# Altium PCB DCDC_5V.PcbDoc
Units mm, origin at the board's own origin, x right, y up, seen from the top; angles counter-clockwise.
Board outline 21 x 14 mm, 4 copper layers (Top Layer, Int1 (GND), Int2 (PWR), Bottom Layer), stack 1.369 mm thick; 8 components, 6 nets, 43 pads, 0 vias.
Unrouted connection lines stored in the file: 31.
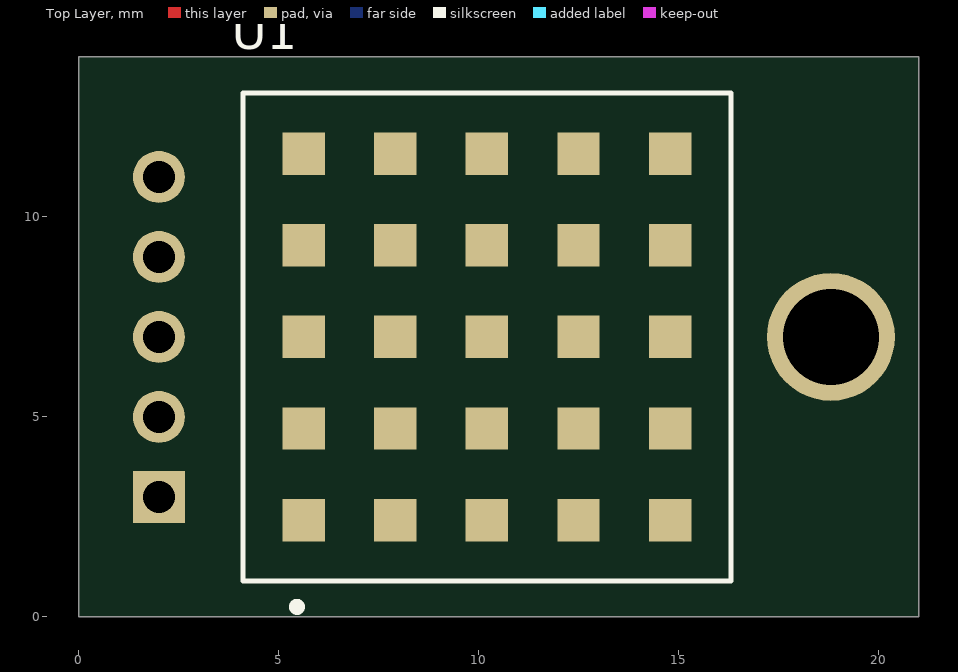
[diagram p0: Top Layer view]
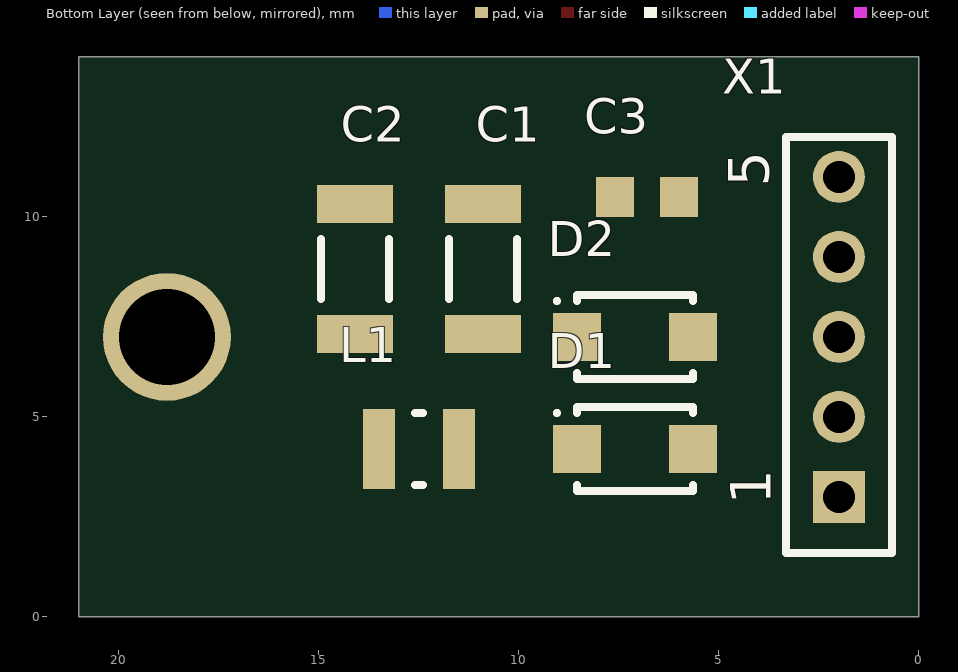
[diagram p1: Bottom Layer view, seen from below]
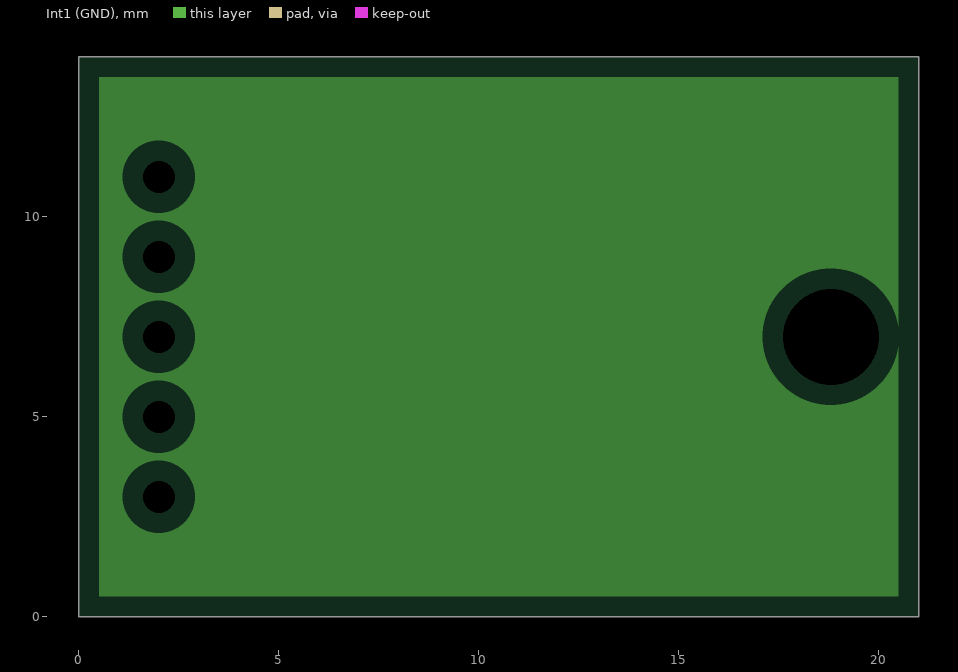
[diagram p2: Int1 (GND), clearances drawn from the general rule]
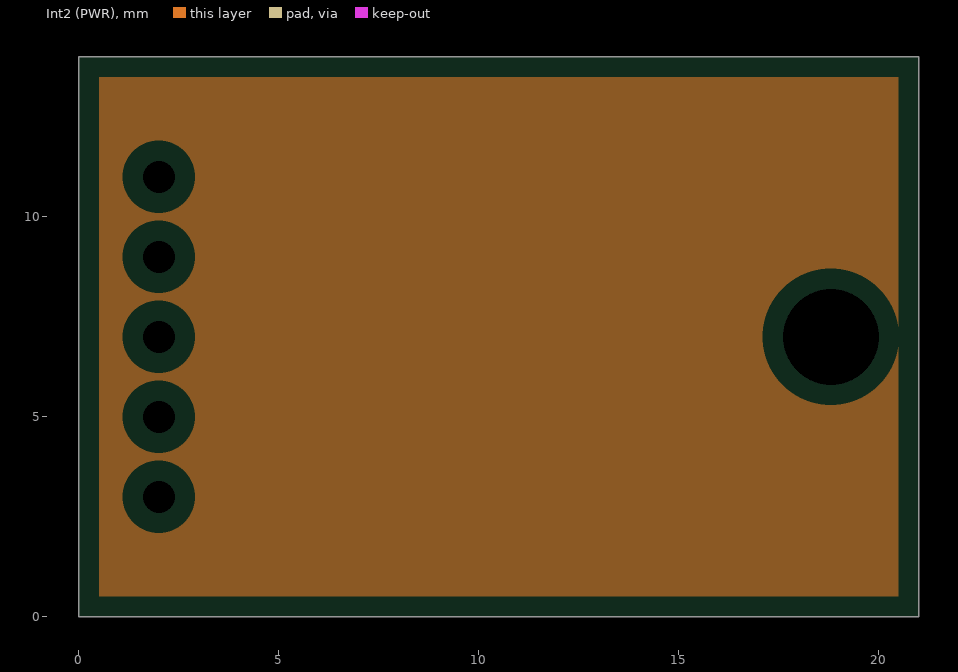
[diagram p3: Int2 (PWR), clearances drawn from the general rule]

## Layer stack, top to bottom
Top Solder: solder mask 0.0254, SM-001, Dk 4
Top Layer: signal copper 0.035
Dielectric 1: prepreg 0.1295, PP-017, Dk 4.3
Dielectric 2: prepreg 0.1295, PP-017, Dk 4.3
Int1 (GND): plane copper 0.035
Dielectric 3: core 0.7112, Core-039, Dk 4.8
Int2 (PWR): plane copper 0.035
Dielectric 4: prepreg 0.1295, PP-017, Dk 4.3
Dielectric 5: prepreg 0.1295, PP-017, Dk 4.3
Bottom Layer: signal copper 0.035
Bottom Solder: solder mask 0.0254, SM-001, Dk 4

## Board outline
0,0 21,0 21,14 0,14

## Design rules (kind name [scope] priority, off if disabled: settings)
Clearance [All] p1: gap=0.2 ignorepadtopadclearanceinfootprint=FALSE except(0: Arc-Hole Track-Hole SMDPad-Hole THPad-Hole Via-Hole Fill-Hole Poly-Hole Region-Hole Text-Hole)
HoleSize [All] p1: absolutevalues=TRUE maxlimit=3.5 minlimit=0.025 maxpercent=80.000 minpercent=20.000
PlaneClearance [All] p1: clearance=0.508
PlaneConnect [All] p1: planeconnectstyle=Relief reliefexpansion=0.508 reliefentries=4 reliefconductorwidth=0.254 reliefairgap=0.254
PolygonConnect [All] p1: connectstyle=Relief reliefconductorwidth=0.254 reliefentries=4 polygonreliefangle="90 Angle" airgapwidth=0.254
RoomDefinition DCDC_5V [InComponentClass('DCDC_5V')] p1: confinementstyle=ConfineIn formatcopy=TRUE lockcomponents=FALSE outline 151.498,1.499 200.498,1.499 200.498,16.999 151.498,16.999
RoutingCorners [All] p1: cornerstyle=45-Degree minsetback=2.5 maxsetback=2.5
RoutingVias [All] p1: holewidth=0.25 width=0.65 viastyle="Through Hole" minholewidth=0.25 minwidth=0.6 maxholewidth=1.8 maxwidth=2
SolderMaskExpansion [All] p1: expansion=0.102 istentingtop=FALSE
Width [All] p1: maxlimit=0.5 minlimit=0.15 preferedwidth=0.2
26 further rules are at their usual default settings.

## Components (designator, comment, footprint, x,y, rotation, side; value= is the part's Value field where it differs from the comment)
C1 "CAP CER 3.3uF 1206" CAPC3216X19N 10.9,8.7 r270 bottom value=3.3uF
C2 "CAP CER 2.2uF 1206" CAPC3216X19N 14.1,8.7 r270 bottom value=2.2uF
C3 "CAP CER 22uF 0603" CAPC1608X08N 6.8,10.5 r0 bottom value=22uF
D1 "DIODE SCHOTTKY 100V 1A SOD123" DIOM2617X11N 7.1,4.2 r180 bottom value=PMEG10010ELRX
D2 "DIODE SCHOTTKY 100V 1A SOD123" DIOM2617X11N 7.1,7 r180 bottom value=PMEG10010ELRX
L1 "IND SMD 2020" INDC2520X12N 12.5,4.2 r0 bottom value=4.7uH
U1 "DCDC 5V 1.5A" CONV_RPMH5.0-1.5 10.2,7 r90 top value=RPMH5.0-1.5
X1 "CONNECT HEADER 5pos 180°" "62000611821 - 5pin" 2,8 r90 bottom

## Footprints (in the part's own frame and the unit in brackets; to place one, negate y for a bottom-side part, rotate by r counter-clockwise, add the part's x,y. Pads: shape width x height; smd on the part's side, far side on the other; paste and mask are expansions set on the pad)
"62000611821 - 5pin" [mm] "Socket Header, Pitch 2.00 mm, THT, Vertical, single row, 6p"
  rect 1.3x1.3 hole 0.8: 1(-5,0)
  round 1.3 hole 0.8: 2(-3,0) 3(-1,0) 4(1,0) 5(3,0)
  silkscreen extent -6.4,-1.33 4,1.33, body extent -6.25,-1.25 4,1.25, height 4.35
CAPC1608X08N [mm] "Chip Capacitor, 2-Leads, Body 1.60x0.80mm, IPC Medium Density"
  rect 0.95x1 smd: 1(-0.8,0) 2(0.8,0)
  body extent -0.87,-0.47 0.88,0.48, height 0.8
CAPC3216X19N [mm] "Chip Capacitor, 2-Leads, Body 3.20x1.65mm, IPC Medium Density"
  rect 0.95x1.9 smd: 1(-1.625,0) 2(1.625,0)
  silkscreen extent -0.75,-0.85 0.75,0.85, body extent -1.75,-0.95 1.75,0.95, height 1.9
CONV_RPMH5.0-1.5 [mm]
  rect 1.06x1.06 smd: A1(-4.58,4.58) A2(-2.29,4.58) A3(0,4.58) A4(2.29,4.58) A5(4.58,4.58) B1(-4.58,2.29) B2(-2.29,2.29) B3(0,2.29) B4(2.29,2.29) B5(4.58,2.29) C1(-4.58,0) C2(-2.29,0) C3(0,0) C4(2.29,0) C5(4.58,0) D1(-4.58,-2.29) D2(-2.29,-2.29) D3(0,-2.29) D4(2.29,-2.29) D5(4.58,-2.29) E1(-4.58,-4.58) E2(-2.29,-4.58) E3(0,-4.58) E4(2.29,-4.58) E5(4.58,-4.58)
  silkscreen extent -6.85,-6.1 6.1,6.1, body extent -6.34,-6.19 6.35,6.19, height 3.97
DIOM2617X11N [mm] "Molded Diode, 2-Leads, Body 2.60x1.70mm, IPC Medium Density"
  rect 1.2x1.2 smd: 1(-1.45,0) 2(1.45,0)
  silkscreen extent -2,-1.05 1.45,1.05, body extent -2,-0.95 2,0.95, height 1.1
INDC2520X12N [mm] "Chip Inductor, 2-Leads, Body 2.50x2.00mm, IPC Medium Density"
  rect 0.8x2 smd: 1(-1,0) 2(1,0)
  silkscreen extent -0.1,-0.9 0.1,0.9, body extent -1.35,-1.1 1.35,1.1, height 1.2

## Part data
C1: library part "CAP CER 3.3uF 10% 100V 1206", "3,3µF ±10% 100V Condensateurs céramique X7S 1206 (3216 métrique)", Supplier Part Number 1=445-15583-1-ND, Supplier 1=Digi-Key
C2: library part "CAP CER 2.2uF 10% 75V 1206", "2,2µF ±10% 75V Condensateurs céramique X7R 1206 (3216 métrique)", Supplier Part Number 1=445-181654-1-ND, Supplier 1=Digi-Key
C3: library part "CAP CER 22uF 200% 6V3 0603", "22µF ±20% 6,3V Condensateurs céramique X5R 0603 (1608 métrique)"
D1 D2: "Diode Schottky 100V 1A Montage en surface CFP3", Supplier Part Number 1=1727-2394-1-ND, Supplier 1=Digi-Key
L1: library part "IND SMD 4.7uH", "4,7µH Blindé Inducteur 1,5A 190mOhms maxi 1008 (2520 métrique)", Supplier Part Number 1=490-13051-1-ND, Supplier 1=Digi-Key
U1: library part RPMH5.0-1.5
X1: library part "CONNECT HEADER 5pos 180° 2mm", system=connector, Use=CommandBoard

## Free pads (board coordinates)
  round 3.2 hole 2.4: 1(18.8,7)

## Nets (pads, with @x,y where several pads share a name; then routed paths per layer and width w, separated by ;. In a path a pad name is that pad's centre, name@x,y a point inside that pad or via, vN(x,y) a via of type N, cw(c..) or ccw(c..) an arc to the next point about the centre after c; other vN are vias at no path point)
DCDC_5V: C3.2 U1.A5 U1.B5 U1.C5 X1.4
DCDC_GND: C1.1 C2.1 C3.1 U1.A3 U1.A4 U1.B1 U1.B2 U1.B3 U1.B4 U1.C2 U1.C3 U1.C4 U1.D2 U1.D3 U1.D4 U1.D5 U1.E3 U1.E4 X1.3 X1.5
NetC1_2: C1.2 D1.1 D2.1 L1.1
NetC2_2: C2.2 L1.2 U1.A1 U1.A2
NetD1_2: D1.2 X1.1
NetD2_2: D2.2 X1.2
pads on no net: U1.C1 U1.D1 U1.E1 U1.E2 U1.E5

## Polygon pours and split planes (outlines as drawn)
no net on Int1 (GND) (split plane): 20.49,0.51 0.51,0.51 0.51,13.49 20.49,13.49
no net on Int2 (PWR) (split plane): 20.49,0.51 0.51,0.51 0.51,13.49 20.49,13.49

## Silkscreen, mask and mechanical layers (free items; w line width, h text height)
Board:
  the board outline again, w1
Dimensions:
  the board outline again, w1
Fab Notes:
  drawing of 264 lines, arcs and shapes, not listed
  text "Layer" at 1.6,183.85 h1.5
  text "Name" at 7.876,183.85 h1.5
  text "Material" at 23.884,183.85 h1.5
  text "Thickness" at 33.916,183.85 h1.5
  text "Constant" at 42.873,183.85 h1.5
  text "Board Layer Stack" at 51.164,183.85 h1.5
  text "Top Overlay" at 7.876,180.85 h1.5
  text "Top Solder" at 7.876,177.85 h1.5
  text "SM-001" at 23.884,177.85 h1.5
  text "0.025mm" at 33.916,177.85 h1.5
  text "4" at 42.873,177.85 h1.5
  text "Top Surface Finish" at 7.876,174.85 h1.5
  text "Nickel, Gold" at 23.884,174.85 h1.5
  text "0.020mm" at 33.916,174.85 h1.5
  text "1" at 1.6,171.85 h1.5
  text "Top Layer" at 7.876,171.85 h1.5
  text "CF-004" at 23.884,171.85 h1.5
  text "0.035mm" at 33.916,171.85 h1.5
  text "Dielectric 1" at 7.876,168.85 h1.5
  text "PP-017" at 23.884,168.85 h1.5
  text "0.129mm" at 33.916,168.85 h1.5
  text "4.3" at 42.873,168.85 h1.5
  text "Dielectric 2" at 7.876,165.85 h1.5
  text "PP-017" at 23.884,165.85 h1.5
  text "0.129mm" at 33.916,165.85 h1.5
  text "4.3" at 42.873,165.85 h1.5
  text "2" at 1.599,162.85 h1.5
  text "Int1 (GND)" at 7.876,162.85 h1.5
  text "CF-004" at 23.884,162.85 h1.5
  text "0.035mm" at 33.916,162.85 h1.5
  text "Dielectric 3" at 7.876,159.85 h1.5
  text "Core-039" at 23.884,159.85 h1.5
  text "0.711mm" at 33.916,159.85 h1.5
  text "4.8" at 42.873,159.85 h1.5
  text "3" at 1.6,156.85 h1.5
  text "Int2 (PWR)" at 7.876,156.85 h1.5
  text "CF-004" at 23.884,156.85 h1.5
  text "0.035mm" at 33.916,156.85 h1.5
  text "Dielectric 4" at 7.876,153.85 h1.5
  text "PP-017" at 23.884,153.85 h1.5
  text "0.129mm" at 33.916,153.85 h1.5
  text "4.3" at 42.873,153.85 h1.5
  text "Dielectric 5" at 7.876,150.85 h1.5
  text "PP-017" at 23.884,150.85 h1.5
  text "0.129mm" at 33.916,150.85 h1.5
  text "4.3" at 42.873,150.85 h1.5
  text "4" at 1.6,147.85 h1.5
  text "Bottom Layer" at 7.876,147.85 h1.5
  text "CF-004" at 23.884,147.85 h1.5
  text "0.035mm" at 33.916,147.85 h1.5
  text "Bottom Surface Finish" at 7.876,144.85 h1.5
  text "Nickel, Gold" at 23.884,144.85 h1.5
  text "0.020mm" at 33.916,144.85 h1.5
  text "Bottom Solder" at 7.876,141.85 h1.5
  text "SM-001" at 23.884,141.85 h1.5
  text "0.025mm" at 33.916,141.85 h1.5
  text "4" at 42.873,141.85 h1.5
  text "Bottom Overlay" at 7.876,138.85 h1.5
  text "Configure the stack layer" at 25,85 h10
Drill Drawing:
  circle w0.254: c2.665,135.55 r0.921
  lines w0.2: 0.1,129.243 167.947,129.243 ; 0.1,137.529 167.947,137.529 ; 10.742,125.1 10.742,141.672 ; 18.831,125.1 18.831,141.672 ; 37.13,125.1 37.13,141.672 ; 45.381,125.1 45.381,141.672 ; 57.393,125.1 57.393,141.672 ; 80.173,125.1 80.173,141.672 ; 90.015,125.1 90.015,141.672 ; 102.873,125.1 102.873,141.672 ; 114.172,125.1 114.172,141.672 ; 127.085,125.1 127.085,141.672 ; 147.164,125.1 147.164,141.672 ; 0.1,125.1 167.947,125.1 167.947,141.672 0.1,141.672 0.1,125.1
  lines w0.254: 1.745,130.486 3.586,130.486 3.586,132.327 1.745,132.327 1.745,130.486
  text "Symbol" at 2.586,138.772 h2.4
  text "Count" at 11.985,138.772 h2.4
  text "Hole Size" at 20.074,138.772 h2.4
  text "Plated" at 38.373,138.772 h2.4
  text "Hole Type" at 46.624,138.772 h2.4
  text "Drill Layer Pair" at 58.636,138.772 h2.4
  text "Via/Pad" at 81.416,138.772 h2.4
  text "Pad Shape" at 91.258,138.772 h2.4
  text "Template" at 104.116,138.772 h2.4
  text "Description" at 115.415,138.772 h2.4
  text "Hole Tolerance (+)" at 128.328,138.772 h2.4
  text "Hole Tolerance (-)" at 148.407,138.772 h2.4
  text "1" at 11.985,134.629 h2
  text "2.400mm (94.49mil)" at 20.074,134.629 h2
  text "PTH" at 38.373,134.629 h2
  text "Round" at 46.624,134.629 h2
  text "Top Layer - Bottom Layer" at 58.636,134.629 h2
  text "Pad" at 81.416,134.629 h2
  text "Rounded" at 91.258,134.629 h2
  text "c320h240" at 104.116,134.629 h2
  text "5" at 11.985,130.486 h2
  text "0.800mm (31.50mil)" at 20.074,130.486 h2
  text "PTH" at 38.373,130.486 h2
  text "Round" at 46.624,130.486 h2
  text "Top Layer - Bottom Layer" at 58.636,130.486 h2
  text "Pad" at 81.416,130.486 h2
  text "(Mixed)" at 91.258,130.486 h2
  text "(Mixed)" at 104.116,130.486 h2
  text "6 Total" at 11.985,126.343 h2

## Dimensions
0,0 to 21,0 on Dimensions
0,0 to 0,14 on Dimensions

## Text inside footprints (layer, text, board x,y; h text height)
X1: Bottom Overlay "1" at 3.7,2.8 h1.02 r270; Bottom Overlay "5" at 3.75,10.75 h1.02 r270